# Altium PCB PCB3.PcbDoc
Units mil, origin at the board's own origin, x right, y up, seen from the top; angles counter-clockwise.
Board outline 6000 x 4000 mil, 2 copper layers (Top Layer, Bottom Layer); 56 components, 43 nets, 169 pads, 9 vias.
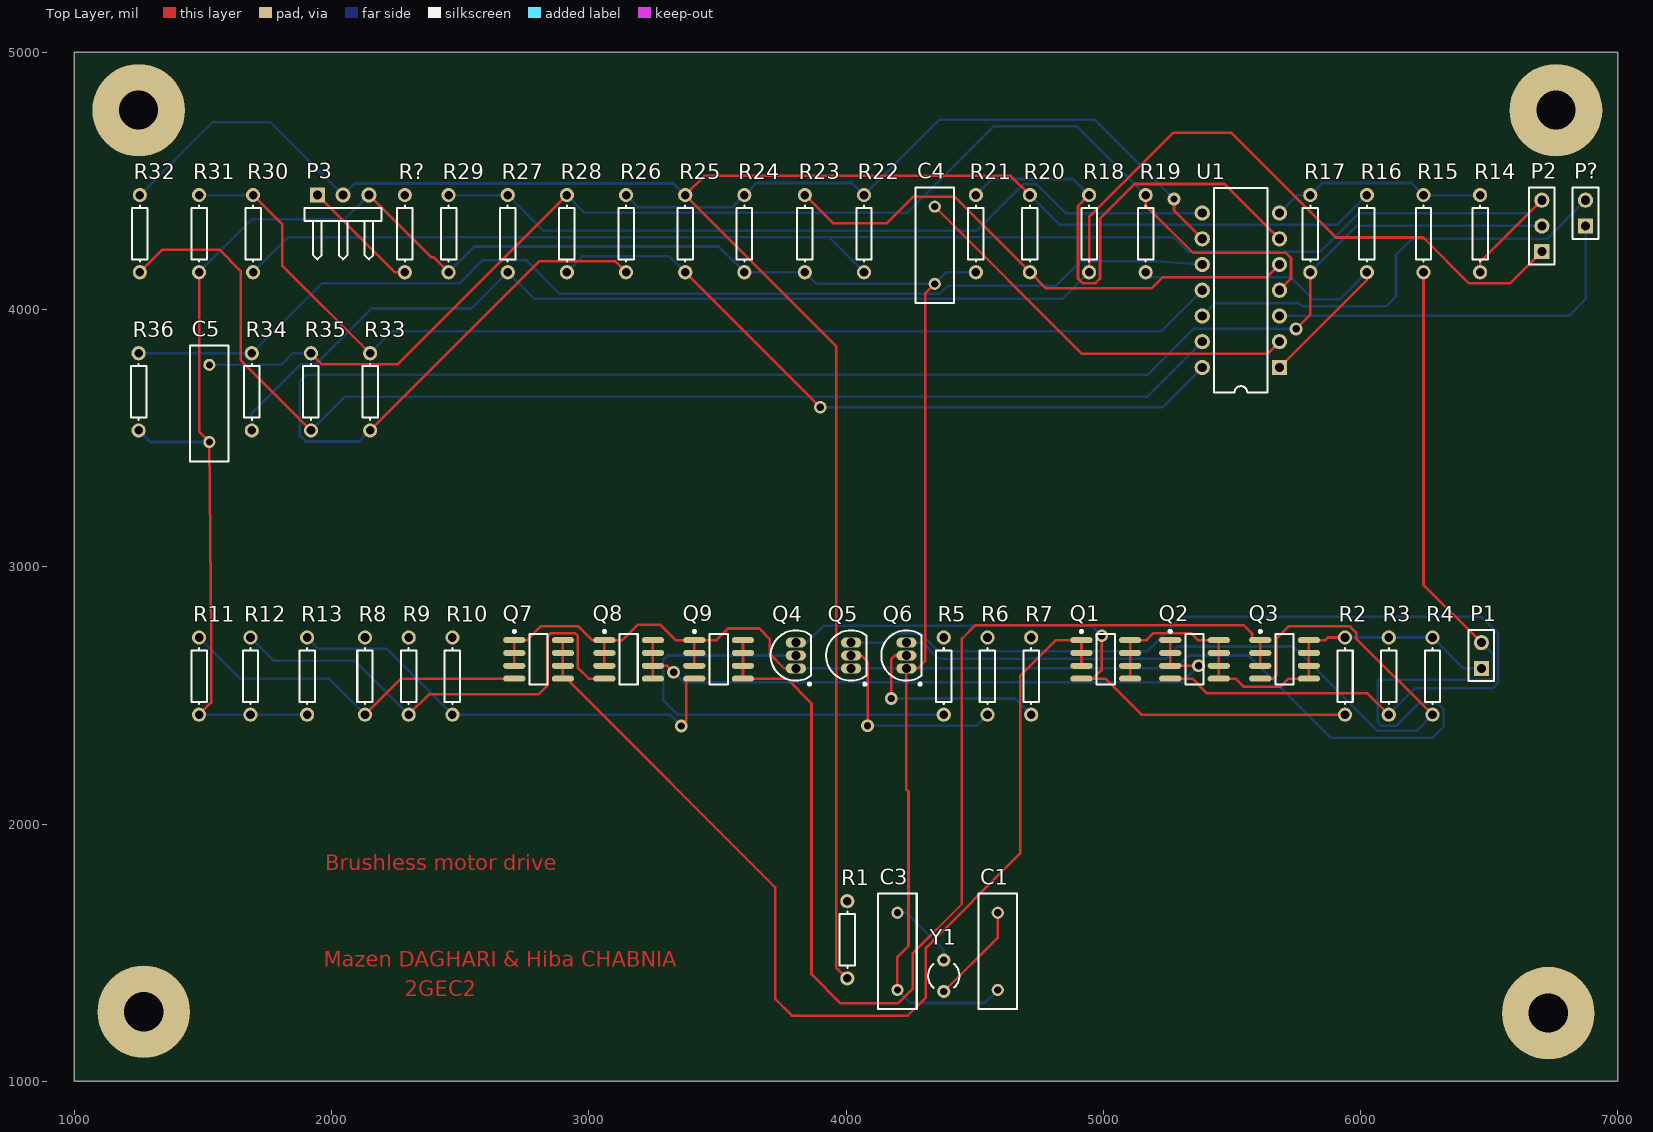
[diagram p0: Top Layer view]
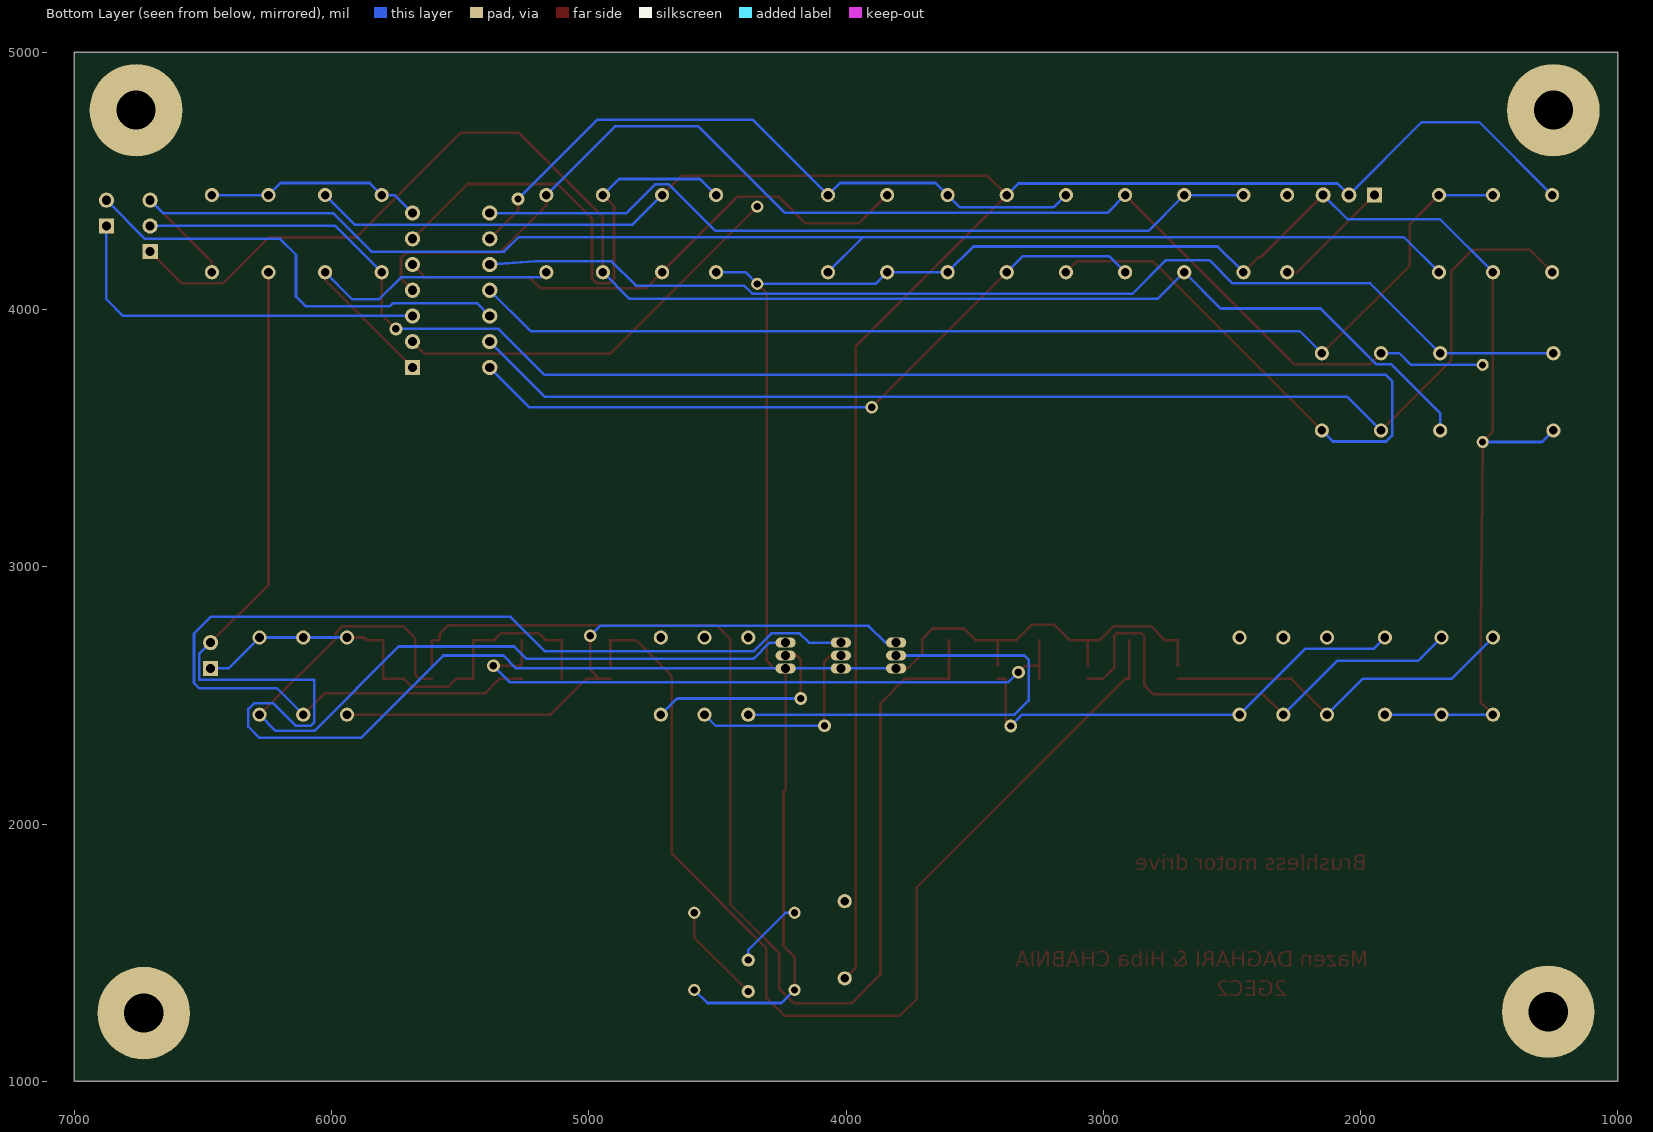
[diagram p1: Bottom Layer view, seen from below]

## Layer stack, top to bottom
Top Solder: solder mask 0.4, Solder Resist, Dk 3.5
Top Layer: signal copper 1.4
Dielectric 1: dielectric 12.6, FR-4, Dk 4.8
Bottom Layer: signal copper 1.4
Bottom Solder: solder mask 0.4, Solder Resist, Dk 3.5

## Board outline
1000,1000 7000,1000 7000,5000 1000,5000

## Design rules (kind name [scope] priority, off if disabled: settings)
Clearance [All] p1: gap=10 ignorepadtopadclearanceinfootprint=FALSE except(0: Arc-Hole Track-Hole SMDPad-Hole THPad-Hole Via-Hole Fill-Hole Poly-Hole Region-Hole Text-Hole)
PolygonConnect [All] p1: connectstyle=Relief reliefconductorwidth=10 reliefentries=4 polygonreliefangle="90 Angle" airgapwidth=10
RoutingVias [All] p1: holewidth=28 width=50 viastyle="Through Hole" minholewidth=28 minwidth=50 maxholewidth=28 maxwidth=50
SolderMaskExpansion [All] p1: expansion=4
Width [All] p1: maxlimit=10 minlimit=10 preferedwidth=10
30 further rules are at their usual default settings.

## Classes and differential pairs
component class "LM3350 IC": C4 C5 P2 P3 P? R14 R15 R16 R17 R18 R19 R20 R21 R22 R23 R24 R25 R26 R27 R28 R29 R30 R31 R32 R33 R34 R35 R36 R? U1
component class "IRF7455 IC": P1 Q1 Q2 Q3 Q4 Q5 Q6 Q7 Q8 Q9 R2 R3 R4 R5 R6 R7 R8 R9 R10 R11 R12 R13
component class "ATMEGA IC": C1 C2 C3 R1 Y1

## Components (designator, comment, footprint, x,y, rotation, side; value= is the part's Value field where it differs from the comment)
C1 "Cap" RAD-0.3 4590,1505 r90 top value=100pF
C3 "Cap" RAD-0.3 4200,1505 r90 top value=100pF
C4 "Cap" RAD-0.3 4345,4250 r90 top value=100pF
C5 "Cap" RAD-0.3 1525,3635 r90 top value=100pF
P1 "Header 2" HDR1X2 6470,2605 r90 top
P2 "Header 3" HDR1X3 6705,4225 r90 top
P3 "Header 3H" HDR1X3H 1945,4445 r0 top
P? "Header 2" HDR1X2 6875,4325 r90 top
Q1 "IRF7456" SO-8_N 5010,2640 r0 top
Q2 "IRF7456" SO-8_N 5355,2640 r0 top
Q3 "IRF7456" SO-8_N 5705,2640 r0 top
Q4 "2N3904" TO-92A 3805,2655 r0 top
Q5 "2N3904" TO-92A 4020,2655 r0 top
Q6 "2N3904" TO-92A 4235,2655 r0 top
Q7 "IRF7456" SO-8_N 2805,2640 r0 top
Q8 "IRF7456" SO-8_N 3155,2640 r0 top
Q9 "IRF7456" SO-8_N 3505,2640 r0 top
R1 "Res1" AXIAL-0.3 4005,1550 r90 top value=1K
R2 "Res1" AXIAL-0.3 5940,2575 r90 top value=1K
R3 "Res1" AXIAL-0.3 6110,2575 r90 top value=1K
R4 "Res1" AXIAL-0.3 6280,2575 r90 top value=1K
R5 "Res1" AXIAL-0.3 4380,2575 r90 top value=1K
R6 "Res1" AXIAL-0.3 4550,2575 r90 top value=1K
R7 "Res1" AXIAL-0.3 4720,2575 r90 top value=1K
R8 "Res1" AXIAL-0.3 2130,2575 r90 top value=1K
R9 "Res1" AXIAL-0.3 2300,2575 r90 top value=1K
R10 "Res1" AXIAL-0.3 2470,2575 r90 top value=1K
R11 "Res1" AXIAL-0.3 1485,2575 r90 top value=1K
R12 "Res1" AXIAL-0.3 1685,2575 r90 top value=1K
R13 "Res1" AXIAL-0.3 1905,2575 r90 top value=1K
R14 "Res1" AXIAL-0.3 6465,4295 r90 top value=1K
R15 "Res1" AXIAL-0.3 6245,4295 r90 top value=1K
R16 "Res1" AXIAL-0.3 6025,4295 r90 top value=1K
R17 "Res1" AXIAL-0.3 5805,4295 r90 top value=1K
R18 "Res1" AXIAL-0.3 4945,4295 r90 top value=1K
R19 "Res1" AXIAL-0.3 5165,4295 r90 top value=1K
R20 "Res1" AXIAL-0.3 4715,4295 r90 top value=1K
R21 "Res1" AXIAL-0.3 4505,4295 r90 top value=1K
R22 "Res1" AXIAL-0.3 4070,4295 r90 top value=1K
R23 "Res1" AXIAL-0.3 3840,4295 r90 top value=1K
R24 "Res1" AXIAL-0.3 3605,4295 r90 top value=1K
R25 "Res1" AXIAL-0.3 3375,4295 r90 top value=1K
R26 "Res1" AXIAL-0.3 3145,4295 r90 top value=1K
R27 "Res1" AXIAL-0.3 2685,4295 r90 top value=1K
R28 "Res1" AXIAL-0.3 2915,4295 r90 top value=1K
R29 "Res1" AXIAL-0.3 2455,4295 r90 top value=1K
R30 "Res1" AXIAL-0.3 1695,4295 r90 top value=1K
R31 "Res1" AXIAL-0.3 1485,4295 r90 top value=1K
R32 "Res1" AXIAL-0.3 1255,4295 r90 top value=1K
R33 "Res1" AXIAL-0.3 2150,3680 r90 top value=1K
R34 "Res1" AXIAL-0.3 1690,3680 r90 top value=1K
R35 "Res1" AXIAL-0.3 1920,3680 r90 top value=1K
R36 "Res1" AXIAL-0.3 1250,3680 r90 top value=1K
R? "Res1" AXIAL-0.3 2285,4295 r90 top value=1K
U1 "LM339AJ" J014 5535,4075 r90 top
Y1 "XTAL" R38 4380,1410 r0 top

## Footprints (in the part's own frame and the unit in brackets; to place one, negate y for a bottom-side part, rotate by r counter-clockwise, add the part's x,y. Pads: shape width x height; smd on the part's side, far side on the other; paste and mask are expansions set on the pad)
AXIAL-0.3 [mm] "Axial Device, Thru-Hole; 2 Leads; 0.3 in Pin Spacing"
  round 1.4 hole 0.85: 1(-3.81,0) 2(3.81,0)
  silkscreen extent -2.77,-0.76 2.77,0.76
HDR1X2 [mm] "Connector; Header; 2 Position"
  rect 1.5x1.5 hole 0.9: 1(0,0)
  round 1.5 hole 0.9: 2(2.54,0)
  silkscreen extent -1.27,-1.27 3.81,1.27
HDR1X3 [mm] "Connector; Header; 3 Position"
  rect 1.5x1.5 hole 0.9: 1(0,0)
  round 1.5 hole 0.9: 2(2.54,0) 3(5.08,0)
  silkscreen extent -1.27,-1.27 6.35,1.27
HDR1X3H [mm] "Connector; Header; 3 Position; Right Angle"
  rect 1.5x1.5 hole 0.9: 1(0,0)
  round 1.5 hole 0.9: 2(2.54,0) 3(5.08,0)
  silkscreen extent -1.27,-6.35 6.35,-1.27
J014 [mm] "DIP; 14 Leads; Row Spacing 7.62 mm; Pitch 2.54 mm"
  rect 1.5x1.5 hole 0.9: 1(-7.62,-3.81)
  round 1.5 hole 0.9: 2(-5.08,-3.81) 3(-2.54,-3.81) 4(0,-3.81) 5(2.54,-3.81) 6(5.08,-3.81) 7(7.62,-3.81) 8(7.62,3.81) 9(5.08,3.81) 10(2.54,3.81) 11(0,3.81) 12(-2.54,3.81) 13(-5.08,3.81) 14(-7.62,3.81)
  silkscreen extent -10.1,-2.65 10.1,2.65, body extent -9.97,-3.93 9.97,3.93, height 5.08
R38 [mm] "Crystal, Thru-Hole; 2 Leads; Body 3.1 x 8.2 mm (Dia.xH)"
  round 1.3 hole 0.7: 1(0,1.55) 2(0,-1.55)
  silkscreen extent -1.55,-1.19 1.55,1.17
RAD-0.3 [mm] "Radial Cap, Thru-Hole; 2 Leads; 0.3 in Pin Spacing"
  round 1.2 hole 0.7: 1(-3.81,0) 2(3.81,0)
  silkscreen extent -5.71,-1.91 5.71,1.91
SO-8_N [mm] "SOIC, 8-Leads, Body 4.9x3.9mm, Pitch 1.27mm, IPC Medium Density"
  oval 2.2x0.6 smd: 1(-2.4,1.905) 2(-2.4,0.635) 3(-2.4,-0.635) 4(-2.4,-1.905) 5(2.4,-1.905) 6(2.4,-0.635) 7(2.4,0.635) 8(2.4,1.905)
  silkscreen extent -2.52,-2.5 0.9,2.88, body extent -2,-2.5 2,2.5, height 1.75
TO-92A [mm] "TO, Flat Index; 3 In-Line, Axial Leads; Body Dia. 4.5mm; Leads 0.51 x 0.48 mm (max)"
  oval 2x1 hole 0.9: 1(0,-1.27) 2(0,0) 3(0,1.27)
  silkscreen extent -2.48,-2.95 1.5,2.48, body extent -2.48,-2.5 1.5,2.5, height 6.86

## Part data
C1 C3 C4 C5: "Capacitor", LatestRevisionDate=17-Jul-2002, LatestRevisionNote="Re-released for DXP Platform.", PackageDescription="Radial Cap, Thru-Hole; 2 Leads; 0.3 in Pin Spacing", PackageReference=RAD-0.3, Published=8-Jun-2000, Publisher="Altium Limited"
P1 P?: "Header, 2-Pin", LatestRevisionDate=17-Jul-2002, LatestRevisionNote="Re-released for DXP Platform.", Publisher="Altium Limited"
P2: "Header, 3-Pin", LatestRevisionDate=17-Jul-2002, LatestRevisionNote="Re-released for DXP Platform.", Publisher="Altium Limited"
P3: "Header, 3-Pin, Right Angle", LatestRevisionDate=17-Jul-2002, LatestRevisionNote="Re-released for DXP Platform.", Publisher="Altium Limited"
Q1 Q2 Q3 Q7 Q8 Q9: "HEXFET Power MOSFET", Code_IPC=SOIC127P600-8, Code_JEDEC=MS-012-AA, ComponentLink1Description="Manufacturer Link", ComponentLink1URL=http://www.irf.com/, ComponentLink2Description=Datasheet, ComponentLink2URL=http://www.irf.com/product-info/datasheets/data/irf7456.pdf, DatasheetVersion=20-Apr-2000, LatestRevisionDate=13-Apr-2006, LatestRevisionNote="IPC-7351 Footprint Added.", PackageDescription="8-Pin Plastic Small Outline Integrated Circuit 1.27 mm Pitch", PackageReference=SO-8, PackageVersion=Feb-2001, Published=17-Sep-2003, Publisher="Altium Limited"
Q4 Q5 Q6: "NPN General Purpose Amplifier", ComponentLink1Description="Manufacturer Link", ComponentLink1URL=http://www.fairchildsemi.com/, ComponentLink2Description=Datasheet, ComponentLink2URL=http://www.fairchildsemi.com/ds/2N%2F2N3904.pdf, DatasheetVersion=1997, LatestRevisionDate=15-Jan-2003, LatestRevisionNote="PCB Footprint 'BCY-W3/D4.7' replaced", PackageDescription="TO, Flat Index; 3 In-Line, Axial Leads; Body Dia. 4.5mm; Leads 0.51 x 0.48 mm (max)", PackageReference=TO-92A, PackageVersion=Sep-1998, Published=8-Jun-2000, Publisher="Altium Limited"
R1 R2 R3 R4 R5 R6 R7 R8 R9 R10 R11 R12 R13 R14 R15 R16 R17 R18 R19 R20 R21 R22 R23 R24 R25 R26 R27 R28 R29 R30 R31 R32 R33 R34 R35 R36 R?: "Resistor", LatestRevisionDate=17-Jul-2002, LatestRevisionNote="Re-released for DXP Platform.", PackageDescription="Axial Device, Thru-Hole; 2 Leads; 0.3 in Pin Spacing", PackageReference=AXIAL-0.3, Published=8-Jun-2000, Publisher="Altium Limited"
U1: "Quad Differential Comparator", ComponentLink1Description="Manufacturer Link", ComponentLink1URL=http://www.ti.com/, ComponentLink2Description=Datasheet, ComponentLink2URL=http://www-s.ti.com/sc/ds/lm139a.pdf, DatasheetVersion=Apr-1988, LatestRevisionDate=04-Mar-2005, LatestRevisionNote="Stylized 3D Model Added.", PackageDescription="DIP; 14 Leads; Row Spacing 7.62 mm; Pitch 2.54 mm", PackageReference=J014, PackageVersion=Jun-1999, Published=15-Apr-2002, Publisher="Altium Limited"
Y1: "Crystal Oscillator", LatestRevisionDate=17-Jul-2002, LatestRevisionNote="Re-released for DXP Platform.", PackageDescription="Crystal, Thru-Hole; 2 Leads; Body 3.1 x 8.2 mm (Dia.xH)", PackageReference=R38, Published=8-Jun-2000, Publisher="Altium Limited"

## Free pads (board coordinates)
  round 360 hole 152: 1(1270,1270) 2(6730,1265) 3(6760,4775) 5(1250,4775)

## Via types
v1: diameter 50, hole 28, Top Layer to Bottom Layer, 9 vias

## Nets (pads, with @x,y where several pads share a name; then routed paths per layer and width w, separated by ;. In a path a pad name is that pad's centre, name@x,y a point inside that pad or via, vN(x,y) a via of type N, cw(c..) or ccw(c..) an arc to the next point about the centre after c; other vN are vias at no path point)
GND: C1.1 C3.1 C4.1 C5.1 P1.2 P3.3 Q4.1 Q5.1 Q6.1 Q7.1 Q7.2 Q7.3 Q8.1 Q8.2 Q8.3 Q9.1 Q9.2 Q9.3 R11.1 R12.1 R13.1 R15.1 R21.1 R23.1 R24.1 R29.1 R31.1 R36.1 | length 16106.7
  Top Layer w10: R11.1 1532,2472 1532,2733 C5.1 1485,3525 R31.1 ; P3.3 2386,4204 2396,4204 R29.1 ; Q7.3 Q7.2 Q7.1 2761,2715 2815,2769 2959,2769 3013,2715 Q8.1 ; Q8.3 Q8.2 Q8.1 ; Q9.3 Q9.2 Q9.1 ; Q4.1 3760,2605 3703,2662 3703,2720 3663,2760 3542,2760 3497,2715 Q9.1 ; C3.1 4200,1483 4243,1526 4243,2126 4235,2134 Q6.1 4280,2605 4308,2633 4308,4063 C4.1 ; R15.1 6245,2930 P1.2 ; Q8.1 3131,2715 3190,2774 3279,2774 3338,2715 Q9.1
  Bottom Layer w10: R36.1 1295,3485 C5.1 ; R11.1 R12.1 R13.1 ; R31.1 1691,4351 2051,4351 P3.3 ; R29.1 2555,4245 3505,4245 R24.1 R23.1 3885,4100 C4.1 4390,4145 R21.1 ; Q4.1 Q5.1 Q6.1 5282,2605 5332,2655 5565,2655 5885,2335 6280,2335 6323,2378 6323,2447 6300,2470 6228,2470 6140.44,2382.44 6080,2382.44 6067.44,2395 6067.44,2560 6067.91,2560.47 6514.53,2560.47 6514.53,2660.47 P1.2 ; C3.1 4251,1304 4539,1304 C1.1
NetC1_2: C1.2 Y1.2 | length 393
  Top Layer w10: Y1.2 4590,1558.98 C1.2
NetC2_10: R1.2
NetC2_18: R7.2
NetC2_20: R10.2
NetC2_21: R6.2
NetC2_22: R9.2
NetC2_23: R5.2
NetC2_24: R8.2
NetC2_31: R?.2
NetC3_2: C3.2 Y1.1 | length 279.6
  Bottom Layer w10: C3.2 4236,1655 4380,1511 Y1.1
NetC4_2: C4.2 U1.2 | length 1596.4
  Top Layer w10: C4.2 4917,3828 5638,3828 U1.2
NetC5_2: C5.2 R19.2 R28.2 R35.2 U1.4 | length 5060.9
  Top Layer w10: R35.2 1963,3787 2257,3787 R28.2 ; R19.2 5165,4405 5350,4220 5710,4220 5730,4200 5730,4120 U1.4
  Bottom Layer w10: C5.2 1804,3785 1849,3830 R35.2 ; R28.2 2984,4376 4238,4376 4574,4712 4898,4712 R19.2
NetP1_1: P1.1 Q1.5 Q1.6 Q1.7 Q1.8 Q2.5 Q2.6 Q2.7 Q2.8 Q3.5 Q3.6 Q3.7 Q3.8 R2.2 R3.2 R4.2 | length 1917.4
  Top Layer w10: Q1.5 Q1.6 Q1.7 Q1.8 5169,2715 5196,2742 5341,2742 5368,2715 Q2.8 Q2.7 Q2.6 Q2.5 5514,2565 5545,2534 5689,2534 5720,2565 Q3.5 Q3.6 Q3.7 Q3.8 5864,2715 5874,2725 R2.2
  Bottom Layer w10: R2.2 R3.2 R4.2 6400,2605 P1.1
NetP2_1: P2.1 R18.1 R27.1 R34.1 | length 6038.8
  Top Layer w10: R18.1 4945,4359 5274,4688 5496,4688 5904,4280 6244,4280 6422,4102 6582,4102 P2.1
  Bottom Layer w10: R34.1 1690,3597 1880,3787 1938,3787 2155,4004 2544,4004 R27.1 2788.62,4041.38 4841.38,4041.38 R18.1
NetP2_2: P2.2 R17.1 R26.1 R33.1 | length 6972.1
  Top Layer w10: R33.1 2808,4188 3102,4188 R26.1 ; v1(5750,3925) 5805,3980 R17.1
  Bottom Layer w10: R33.1 2107,3487 1900,3487 1877,3510 1877,3722 1901,3746 5172,3746 5351,3925 v1(5750,3925) ; R17.1 5985,4325 P2.2
NetP2_3: P2.3 R14.1 R22.1 R30.1 | length 5744.1
  Top Layer w10: R14.1 6465,4185 P2.3
  Bottom Layer w10: R30.1 1831,4281 3934,4281 ; R22.1 3934,4281 ; P2.3 6655,4375 5995,4375 5845,4225 5329,4225 5273,4281 3934,4281
NetP3_1: P3.1 R?.1 | length 464.3
  Top Layer w10: P3.1 2245,4145 R?.1
NetP?_1: P?.1 U1.3 | length 1501.9
  Bottom Layer w10: U1.3 6810,3975 6875,4040 P?.1
NetP?_2: P?.2 U1.12 | length 1781.8
  Bottom Layer w10: U1.12 5435,4025 5761,4025 5773,4013 6101,4013 6138,4050 6138,4213 6200,4275 6725,4275 P?.2
NetQ1_1: Q1.1 Q1.2 Q1.3 Q7.5 Q7.6 Q7.7 Q7.8 | length 4184.9
  Top Layer w10: Q7.8 Q7.7 Q7.6 Q7.5 2914,2565 3725,1754 3725,1320 3790,1255 4240,1255 4310.5,1325.5 4310.5,1518.5 4677,1885 4677,2575 4817,2715 Q1.1 Q1.2 Q1.3
NetQ1_4: Q1.4 Q4.3 R2.1 | length 2495.2
  Top Layer w10: Q1.4 4960,2565 ; v1(4994,2732) 4994,2599 4960,2565 ; R2.1 5148,2425 5008,2565 4960,2565
  Bottom Layer w10: Q4.3 3847,2705 3912,2770 4956,2770 v1(4994,2732)
NetQ2_1: Q2.1 Q2.2 Q2.3 Q8.5 Q8.6 Q8.7 Q8.8 | length 2535.5
  Top Layer w10: Q8.5 Q8.6 ; Q8.8 Q8.7 Q8.6 ; v1(3330,2590) 3305,2615 Q8.6 ; Q2.1 Q2.2 Q2.3 v1(5371,2615)
  Bottom Layer w10: v1(3330,2590) 3369.57,2550.43 5306.43,2550.43 v1(5371,2615)
NetQ2_4: Q2.4 Q5.3 R3.1 | length 4216.1
  Top Layer w10: Q2.4 5347,2565 5404,2508 6027,2508 R3.1
  Bottom Layer w10: Q5.3 4144,2705 4180,2741 4290,2741 4360,2671 5170,2671 5304,2805 6470,2805 6534.53,2740.47 6534.53,2548 6514.53,2528 6213,2528 R3.1
NetQ3_1: Q3.1 Q3.2 Q3.3 Q9.5 Q9.6 Q9.7 Q9.8 | length 4732.7
  Top Layer w10: Q9.8 Q9.7 Q9.6 Q9.5 3770,2565 3866,2469 3866,1416 3979,1303 4203,1303 4260,1360 4260,1498 4450,1688 4450,2720 4502,2772 5547,2772 5579,2740 5579,2715 Q3.1 Q3.2 Q3.3
NetQ3_4: Q3.4 Q6.3 R4.1 | length 3245.5
  Top Layer w10: Q3.4 5660,2565 5674,2579 5674,2722 5720,2768 5960,2768 5983,2745 5983,2722 R4.1
  Bottom Layer w10: Q6.3 4297,2705 4360,2642 5242,2642 5290,2690 5739,2690 6066.56,2362.44 6217.44,2362.44 R4.1
NetQ4_2: Q4.2 R5.1 | length 1793.4
  Bottom Layer w10: Q4.2 3306,2655 3290,2639 3290,2480 3345,2425 R5.1
NetQ5_2: Q5.2 R6.1 | length 806.8
  Top Layer w10: Q5.2 4060,2655 4084,2631 v1(4084,2382)
  Bottom Layer w10: v1(4084,2382) 4507,2382 R6.1
NetQ6_2: Q6.2 R7.1 | length 787.9
  Top Layer w10: v1(4176,2488) 4176,2641 4190,2655 Q6.2
  Bottom Layer w10: v1(4176,2488) 4657,2488 R7.1
NetQ7_4: Q7.4 R8.1 R11.2 | length 1407.8
  Top Layer w10: R8.1 2270,2565 Q7.4
  Bottom Layer w10: R11.2 1645,2565 1990,2565 R8.1
NetQ8_4: Q8.4 R9.1 R12.2 | length 1887.6
  Top Layer w10: R9.1 2380,2505 2806,2505 2841,2540 2841,2730 2852.81,2741.81 2946.19,2741.81 2958,2730 2958,2607 3000,2565 Q8.4
  Bottom Layer w10: R12.2 1776,2634 2091,2634 R9.1
NetQ9_4: Q9.4 R10.1 R13.2 | length 1819.9
  Top Layer w10: v1(3359.5,2381.5) 3379,2401 3379,2565 Q9.4
  Bottom Layer w10: R13.2 1948,2682 2213,2682 R10.1 3316,2425 v1(3359.5,2381.5)
NetR14_2: R14.2 R15.2 R17.2 U1.7 | length 847.9
  Bottom Layer w10: U1.7 5755,4445 R17.2 5852,4492 6198,4492 R15.2 R14.2
NetR16_1: R16.1 R19.1 U1.1 | length 1457.8
  Top Layer w10: U1.1 6025,4115 R16.1
  Bottom Layer w10: R19.1 5185,4125 5730,4125 5815,4040 5920,4040 R16.1
NetR18_2: R18.2 R21.2 U1.6 | length 2009.7
  Top Layer w10: R18.2 4902,4402 4902,4120 4919.56,4102.44 4970,4102.44 4987.56,4120 4987.56,4353.56 5122,4488 5472,4488 U1.6
  Bottom Layer w10: R21.2 4567.56,4507.56 4882.44,4507.56 R18.2
NetR20_1: R20.1 R23.2 U1.5 | length 2118.8
  Top Layer w10: R23.2 3949,4336 4159,4336 4262,4439 4421,4439 R20.1 4777.56,4082.44 5188.44,4082.44 5231,4125 5635,4125 U1.5
NetR22_2: R22.2 R24.2 R26.2 U1.9 | length 2656.5
  Top Layer w10: v1(5275,4430) 5275,4385 U1.9
  Bottom Layer w10: R26.2 3192,4398 3558,4398 R24.2 3652,4492 4023,4492 R22.2 4362,4737 4968,4737 v1(5275,4430)
NetR25_1: R25.1 R28.1 U1.14 | length 2803.5
  Top Layer w10: R25.1 v1(3900,3620)
  Bottom Layer w10: R28.1 2977.56,4207.56 3312.44,4207.56 R25.1 ; v1(3900,3620) 5230,3620 U1.14
NetR27_2: R27.2 R29.2 U1.8 | length 3109.4
  Bottom Layer w10: R29.2 R27.2 2824,4306 4508,4306 4689.56,4487.56 4741.44,4487.56 4854,4375 U1.8
NetR30_2: R30.2 R31.2 R33.2 U1.11 | length 4349.9
  Top Layer w10: R30.2 1808,4332 1808,4172 R33.2
  Bottom Layer w10: R31.2 R30.2 ; R33.2 2236,3916 5226,3916 U1.11
NetR32_1: R32.1 R35.1 U1.13 | length 4803.8
  Top Layer w10: R32.1 1343,4233 1564,4233 1647,4150 1647,3803 R35.1
  Bottom Layer w10: R35.1 2050.71,3660.71 5170.71,3660.71 U1.13
NetR34_2: R34.2 R36.2 U1.10 | length 4391.5
  Bottom Layer w10: R36.2 R34.2 1962,4102 2498,4102 2587.69,4191.69 2755.31,4191.69 2885.62,4061.38 4364.38,4061.38 4396,4093 4817,4093 4911.56,4187.56 5208,4187.56 U1.10
VCC: P3.2 R1.1 R16.2 R20.2 R25.2 R32.2 | length 8505.1
  Top Layer w10: R1.1 3962,1443 3962,3858 R25.2 3450,4520 4640,4520 R20.2
  Bottom Layer w10: R32.2 1538,4728 1762,4728 P3.2 2090,4490 3330,4490 R25.2 ; R20.2 4830,4330 5910,4330 R16.2

## Other copper
Top Layer:
  text "Brushless motor drive" at 1975,1820 h60
  text "Mazen DAGHARI & Hiba CHABNIA" at 1970,1445 h60
  text "2GEC2" at 2285,1330 h60